# Altium PCB SENSEI_Base-Board.PcbDoc (part 4 of 10)
Units mm, origin at the board's own origin, x right, y up, seen from the top; angles counter-clockwise.
Board outline 51.6 x 28.1 mm, 8 copper layers (Top Sig/Pwr, GND1, Sig1, GND2, Sig2, Pwr, GND3, Bot Sig/Pwr), stack 1.53 mm thick; 209 components, 201 nets, 1031 pads, 2222 vias.
Unrouted connection lines stored in the file: 214.
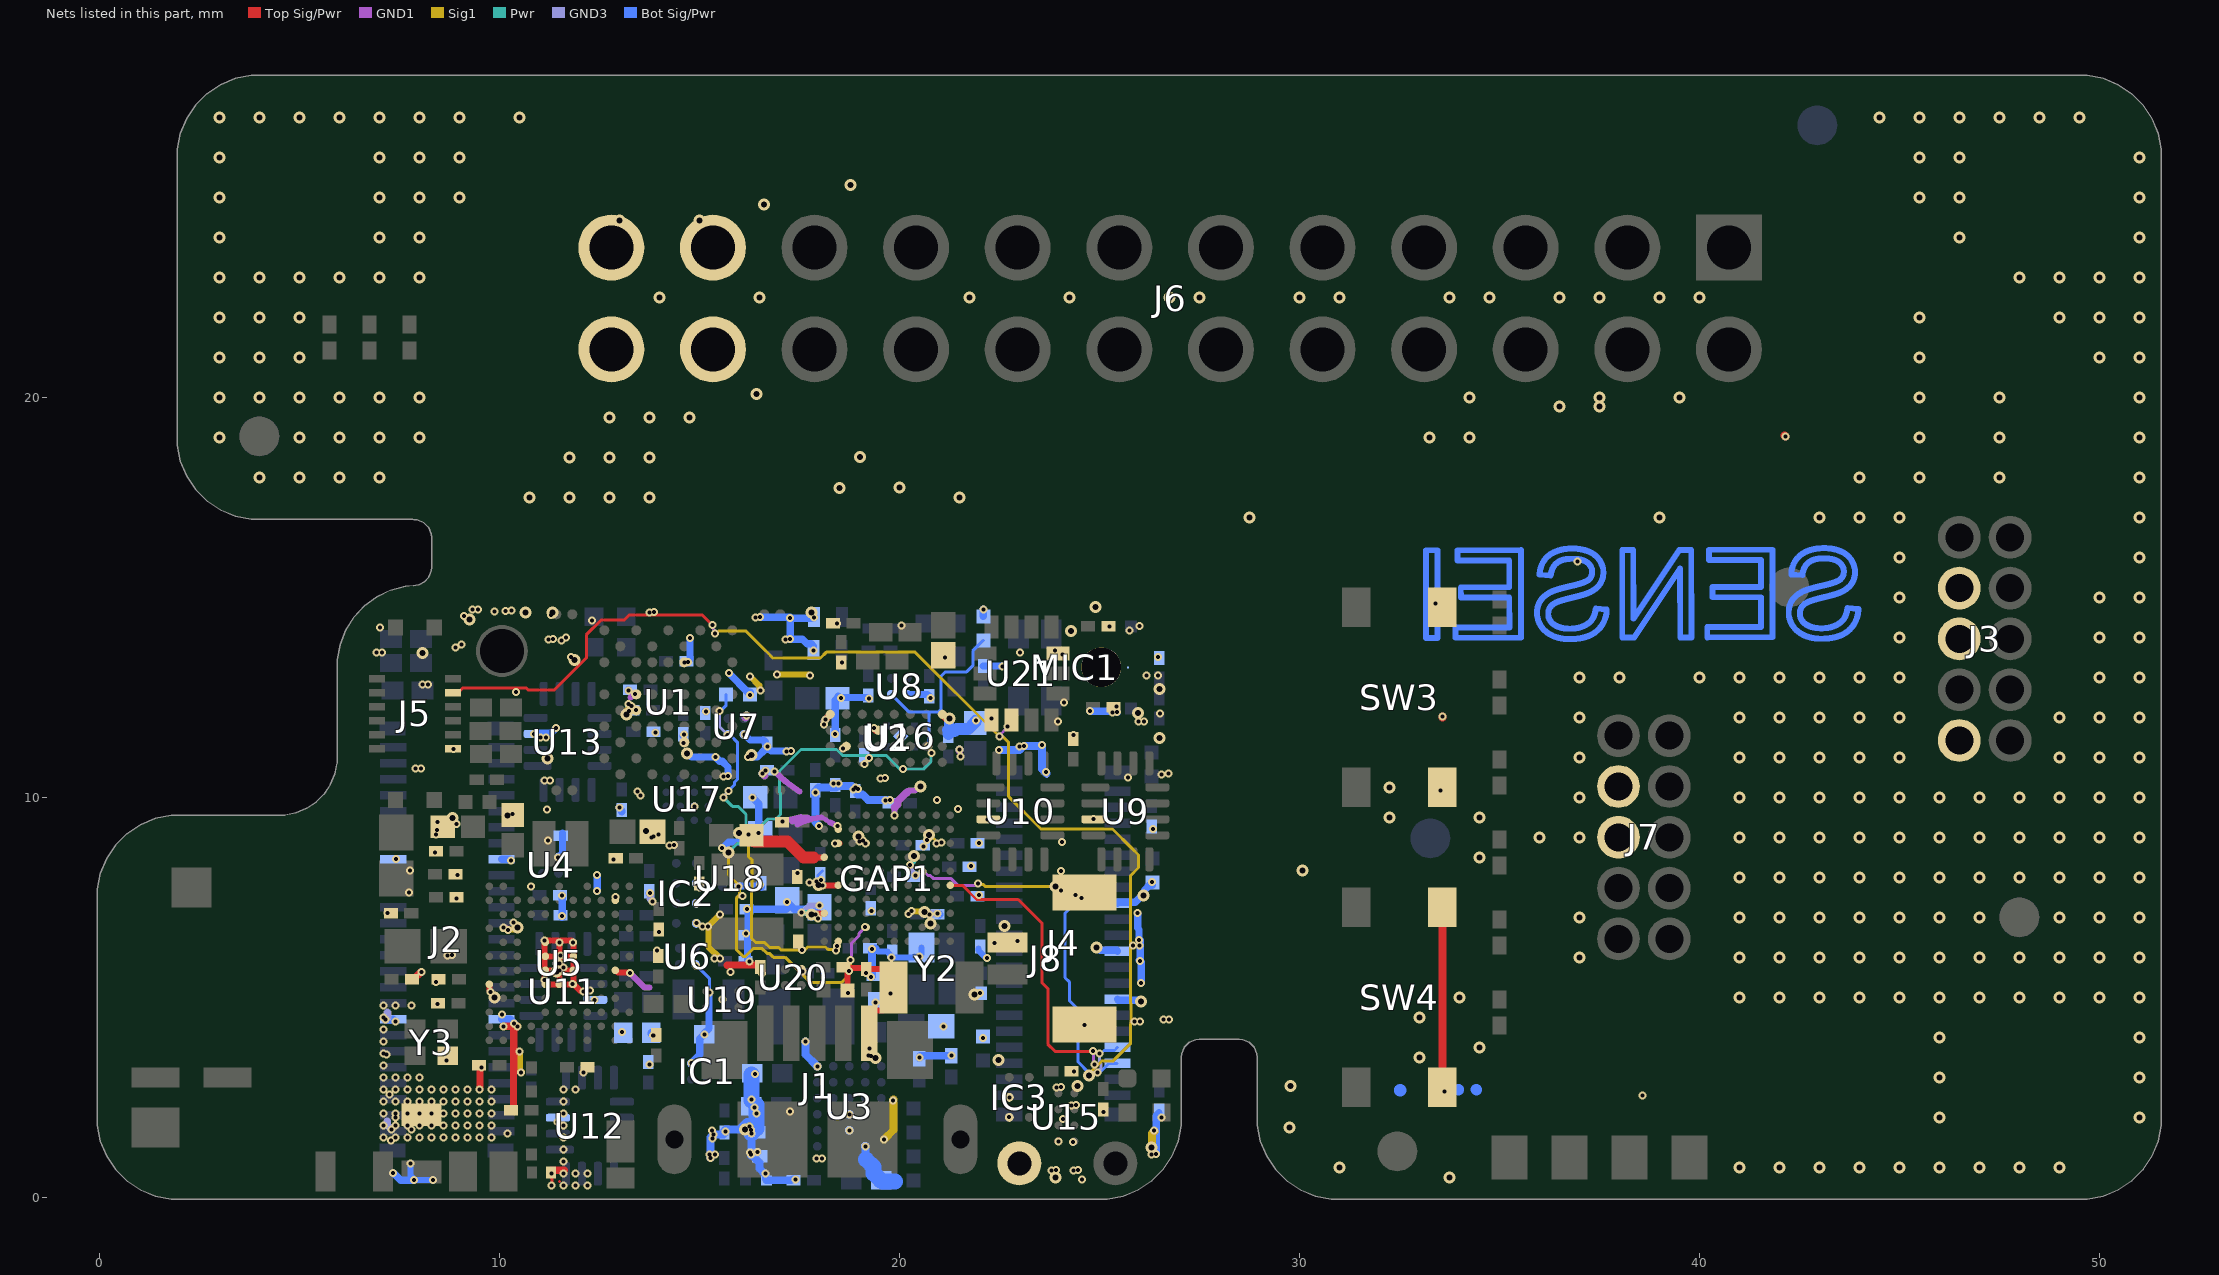
[diagram p9: the nets of this part, all layers, seen from the top]

## Via types
v1: diameter 0.2, hole 0.1, Top Sig/Pwr to GND1, 544 vias
v2: diameter 0.2, hole 0.1, GND3 to Bot Sig/Pwr, 436 vias
v3: diameter 0.2, hole 0.1, GND1 to Sig1, 385 vias
v4: diameter 0.3, hole 0.15, Sig1 to Pwr, 293 vias
v5: diameter 0.3, hole 0.15, Top Sig/Pwr to Bot Sig/Pwr, tented both sides, 284 vias
v6: diameter 0.2, hole 0.1, Pwr to GND3, 280 vias

## Nets (pads, with @x,y where several pads share a name; then routed paths per layer and width w, separated by ;. In a path a pad name is that pad's centre, name@x,y a point inside that pad or via, vN(x,y) a via of type N, cw(c..) or ccw(c..) an arc to the next point about the centre after c; other vN are vias at no path point) (continued)
GAP_GPIO50: GAP1.K5 J4.33 J5.4 U21.2 | length 37.2
  Top Sig/Pwr w0.075: J5.4@8.718,12.635 8.986,12.635 9.036,12.684 9.038,12.684 9.084,12.73 10.677,12.73 10.722,12.684 11.374,12.684 12.175,13.485 12.175,14.061 12.552,14.438 13.128,14.438 13.253,14.563 15.069,14.563 v1(15.328,14.304) ; GAP1.K5@21.275,7.8 21.577,7.8 21.933,7.445 22.972,7.445 23.572,6.845 23.572,5.36 23.712,5.219 23.712,3.828 23.891,3.65 24.84,3.65 v1(24.841,3.651)
  GND1 w0.075: v1(15.328,14.304) 15.352,14.28 15.352,14.209 15.369,14.191 15.369,14.124 v3(15.393,14.1) ; v3(22.503,11.516) 22.503,11.547 22.7,11.744 v1(22.7,11.775) ; v1(24.841,3.651) 24.861,3.631 24.861,3.342 v3(24.883,3.32)
  GND3 w0.075: v6(24.96,3.12) 24.96,3.138 25.049,3.226 25.049,3.343 25.011,3.381 v2(25.011,3.597)
  Sig1 w0.075: v3(15.393,14.1) 15.427,14.1 15.485,14.158 15.51,14.158 15.514,14.162 16.155,14.162 16.662,13.655 16.669,13.655 16.839,13.485 18.032,13.485 18.176,13.629 20.391,13.629 22.44,11.58 22.527,11.58 22.725,11.382 22.725,10.025 23.541,9.209 25.33,9.209 25.813,8.726 25.983,8.556 25.983,8.244 25.786,8.047 25.786,4.847 25.788,4.846 25.788,4.348 25.775,4.336 25.775,3.838 25.35,3.413 25.065,3.413 v3@24.927,3.276 ; v3@22.503,11.516 v3@22.548,11.56 ; v4(24.741,3.045) 24.741,3.089 v3@24.927,3.276 ; v3(24.883,3.32) v3@24.927,3.276
  Pwr w0.075: v4(24.741,3.045) 24.802,3.045 24.853,3.096 24.936,3.096 v6(24.96,3.12)
  Bot Sig/Pwr w0.075: v2(25.011,3.597) 25.042,3.597 25.117,3.672 25.378,3.672 J4.33@25.455,3.75
GAP_GPIO51: GAP1.H6 J4.35 | length 9.9
  GND1 w0.075: v1(20.584,8.146) 20.618,8.146 20.716,8.047 20.775,8.047 20.846,7.976 21.286,7.976 21.463,7.799 21.893,7.799 21.934,7.839 v3(21.967,7.839)
  GND3 w0.075: v6(24.047,7.667) 24.081,7.667 24.139,7.609 24.39,7.609 24.521,7.479 v2(24.555,7.479)
  Sig1 w0.075: v3(21.967,7.839) 21.991,7.815 22.105,7.815 22.148,7.773 v4(23.909,7.773)
  Pwr w0.075: v4(23.909,7.773) 23.926,7.773 24.031,7.667 v6(24.047,7.667)
  Bot Sig/Pwr w0.075: v2(24.555,7.479) 24.531,7.455 24.454,7.455 24.328,7.329 24.328,7.289 24.141,7.102 24.141,5.492 24.26,5.373 24.26,4.909 24.472,4.697 24.472,3.382 24.739,3.116 25.006,3.116 25.235,3.345 J4.35@25.441,3.345
GAP_MEM_pwr_sel: GAP1.B1 R11.2 U7.B2 | length 9.7
  Top Sig/Pwr w0.075: v1(18.44,6.282) 18.458,6.299 18.458,6.382 GAP1.B1@18.475,6.4
  GND1 w0.075: v3(18.42,6.176) 18.44,6.196 v1(18.44,6.282)
  GND3 w0.075: v2(15.506,12.162) 15.506,11.763 v2(15.71,11.56) ; v6(15.6,10) 15.6,10.015 15.73,10.145 v2(15.73,10.161)
  Sig1 w0.075: v4(15.992,9.101) 16.008,9.101 16.186,8.924 16.232,8.924 16.232,8.517 16.322,8.427 16.322,7.664 16.31,7.652 16.31,6.469 16.404,6.375 16.626,6.375 16.753,6.248 16.98,6.248 17.044,6.184 17.636,6.184 17.711,6.26 18.156,6.26 18.224,6.191 18.404,6.191 v3(18.42,6.176)
  Pwr w0.075: v6(15.6,10) 15.824,9.776 15.97,9.776 16.17,9.575 16.17,9.295 15.992,9.117 v4(15.992,9.101)
  Bot Sig/Pwr w0.075: v2(15.506,12.162) 15.538,12.162 15.663,12.287 R11.2@15.663,12.575 ; U7.B2@15.7,11.55 15.778,11.55 15.95,11.378 15.95,10.444 15.883,10.377 15.883,10.314 v2(15.73,10.161)
GAP_MIC_pwr_sel: GAP1.D2 R13.2 U8.B2 | length 19.6
  GND1 w0.075: v3(18.784,5.933) 18.803,5.951 18.803,6.35 18.998,6.545 18.998,6.598 19.142,6.743 v1(19.142,6.754)
  GND3 w0.075: v2(20.735,11.288) 20.759,11.264 20.759,11.181 20.804,11.135 v6(20.804,11.102)
  Sig1 w0.075: v4(15.731,8.625) 15.732,8.624 15.732,8.057 16.009,7.78 16.009,7.563 15.934,7.488 15.934,6.182 16.092,6.025 16.154,6.025 16.354,6.225 16.564,6.225 16.691,6.098 16.752,6.098 16.85,6 17.146,6 17.773,5.374 18.569,5.374 18.723,5.528 18.723,5.555 18.784,5.617 v3(18.784,5.933)
  Pwr w0.075: v4(15.731,8.625) 15.945,8.839 16.101,8.839 16.714,9.452 16.875,9.452 16.881,9.458 16.918,9.458 17.029,9.569 17.029,10.101 17.005,10.125 17.005,10.658 17.543,11.197 18.431,11.197 18.578,11.05 19.667,11.05 20.007,10.711 20.614,10.711 20.793,10.889 20.793,11.09 v6(20.804,11.102)
  Bot Sig/Pwr w0.075: U8.B2@19.8,12.575 20.24,12.135 20.736,12.135 ; v2(20.735,11.288) 20.736,11.289 20.736,12.135 ; R13.2@22.099,13.924 21.838,13.663 21.838,13.291 21.684,13.138 21.153,13.138 21.044,13.028 21.044,12.201 20.978,12.135 20.736,12.135
GND: C1.2 C2.2 C3.2 C4.2 C5.2 C6.2 C7.2 C8.2 C9.2 C10.2 C11.2 C12.2 C13.2 C14.2 C15.2 C16.2 C17.2 C18.2 C19.2 C20.2 C21.2 C22.2 C23.2 C24.2 C25.2 C26.2 C27.2 C28.2 C29.2 C30.2 C31.2 C32.2 C33.2 C34.2 C35.2 C36.2 C37.2 C38.2 C39.2 C40.2 C41.2 C42.2 C43.2 C44.2 C47.2 C48.2 C49.2 C50.2 C51.2 C52.2 C53.2 C54.2 C55.2 C56.2 C57.2 C58.2 C59.2 C60.2 C61.2 C62.2 C63.2 C64.2 C65.2 C66.2 C67.2 C68.2 C69.2 C70.2 C71.2 C72.2 C73.2 C74.2 C75.2 C76.2 C77.2 C78.2 C79.2 C80.2 C81.2 C82.2 C83.2 C84.2 C85.2 C86.2 C87.2 C88.2 C89.2 C90.2 C91.2 C92.2 C94.2 C95.2 C96.2 C97.2 C98.2 C99.2 D2.2 D3.2 GAP1.A3 GAP1.A7 GAP1.B5 GAP1.B8 GAP1.B9 GAP1.D8 GAP1.F10 GAP1.G3 GAP1.J8 IC1.A3 IC2.B1 IC2.C1 IC2.D1 IC3.B1 IC3.C1 J1.5 J2.8 J2.18 J2.33 J2.43 J3.3 J3.5 J3.9 J4.15 J4.21 J4.27 J5.12 J6.21 J6.22 J6.23 J6.24 J7.3 J7.5 J8.2 J8.3 J8.4 L9.1 MIC1.3 R2.1 R11.1 R12.1 R13.1 R16.2 R17.1 R23.1 R32.1 RT1.2 S1.1 SW3.3 SW3.4 SW4.3 SW4.4 U1.F6 U1.F7 U1.J4 U1.J9 U2.B7 U2.C5 U2.D1 U2.D8 U3.B1 U3.C2 U3.C3 U3.E6 U4.B1 U5.A5 U5.B2 U5.B9 U5.C2 U5.D12 U5.E5 U5.E6 U5.E7 U5.E8 U5.F5 U5.F6 U5.F7 U5.F8 U5.G5 U5.G6 U5.G7 U5.G8 U5.K6 U5.K11 U6.B1 U7.B1 U8.B1 U9.3 U10.3 U11.3 U12.3 U13.3 U15.D1 U16.3 U17.C2 U18.B1 U19.B1 U20.B1 U21.1 U21.7 Y2.2 Y3.2 | length 161.8
  Top Sig/Pwr w0.075: v1(10.333,9.577) 10.335,9.579 C72.2@10.335,9.605 ; C68.2@11.288,0.512 11.313,0.487 11.313,0.262 v1@11.325,0.25 ; C68.2@11.288,0.625 11.3,0.613 C68.2@11.3,0.5 ; 11.5,0.4 11.504,0.4 ; v1(13.937,6.17) 13.937,6.117 C77.2@13.975,6.079 ; C75.2@13.985,6.646 13.985,6.636 v1(13.988,6.634)
  Top Sig/Pwr w0.15: U5.A5@9.75,5.325 9.758,5.317 9.758,5.164 9.78,5.141 v1(9.78,5.127) ; U5.B9@10.1,6.725 10.1,6.738 v1(10.111,6.749) ; v1(10.798,7.77) 10.8,7.772 U5.D12@10.8,7.775 ; U5.E6@11.125,5.65 U5.E6@11.136,5.661 ; U5.E8@11.125,6.375 11.136,6.364 U5.E6@11.136,5.661 ; U5.E7@11.15,6.025 U5.F7@11.5,6.025 ; U5.E8@11.15,6.375 11.128,6.397 v1(11.128,6.424) 11.801,6.424 U5.G8@11.85,6.375 v1(11.845,6.37) 11.85,6.365 U5.G7@11.85,6.025 U5.G7@11.85,6 ; U5.F8@11.5,6.375 11.501,6.374 v1(11.501,6.369) 11.5,6.368 11.5,6.05 v1(11.525,6.05) ; U5.G5@11.825,5.35 11.85,5.375 U5.G6@11.85,5.675 ; v1(12.1,5.15) 12.09,5.16 12.026,5.16 11.861,5.325 U5.G5@11.85,5.325 U5.F5@11.5,5.325 ; U5.K6@12.9,5.675 12.911,5.675 12.972,5.614 13.261,5.614 v1(13.27,5.605) ; U5.K11@12.9,7.425 12.903,7.428 12.903,7.503 v1(12.905,7.505) ; v1(13.39,12.585) U1.F7@13.425,12.575 ; 17.85,8.5 GAP1.A7@18.122,8.5 ; v1@17.881,7.056 17.922,7.056 17.959,7.093 18.118,7.093 GAP1.A3@18.125,7.1 ; v1(18.075,7.8) GAP1.B5@18.475,7.8 ; GAP1.A7@18.12,8.498 GAP1.A7@18.122,8.5 ; GAP1.A7@18.125,8.5 GAP1.A7@18.122,8.5 ; v1(18.454,9.28) 18.454,9.266 18.468,9.252 18.468,9.207 GAP1.B9@18.475,9.2 ; GAP1.B8@18.5,8.85 GAP1.B8@18.475,8.85 ; C96.2@18.659,5.75 C96.2@18.7,5.709 ; C96.2@18.725,5.775 18.7,5.75 C96.2@18.7,5.709 ; v1(19.161,8.85) GAP1.D8@19.175,8.85 ; v1(19.165,5.606) 19.175,5.616 R16.2@19.175,5.704 R16.2@19.221,5.704 ; R16.2@19.225,5.7 R16.2@19.221,5.704 ; v1(19.25,3.725) J1.5@19.25,4.1 19.25,4.547 19.378,4.675 19.575,4.675 C91.2@19.725,4.825 ; v1(19.775,5.1) 19.85,5.175 C91.2@19.85,5.25 ; C91.2@19.85,5.675 19.821,5.704 R16.2@19.221,5.704 ; GAP1.G3@20.225,7.1 20.228,7.097 v1(20.228,7.081) ; v1(22.2,9.45) U10.3@22.225,9.45 ; U5.E6@11.136,5.661 v1(11.136,5.426) 11.15,5.426 11.251,5.325 U5.F5@11.5,5.325 ; U5.E6@11.136,5.661 U5.E6@11.15,5.675 v1(11.5,5.675) ; U5.F5@11.5,5.325 v1(11.5,5.675) ; v1(11.5,5.675) U5.G6@11.85,5.675 ; v1(11.5,5.675) U5.F7@11.5,6.025 ; U5.F7@11.5,6.025 11.825,6.025 U5.G7@11.85,6 ; U5.G6@11.85,5.675 U5.G7@11.85,6 ; GAP1.B8@18.475,8.85 v1(18.394,8.85) GAP1.B8@18.475,8.85 ; R32.1@18.7,5.175 C96.2@18.7,5.709 ; R32.1@18.7,5.175 18.7,5.129 v1(18.72,5.109) 18.72,5.155 R32.1@18.7,5.175 ; C96.2@18.7,5.709 18.74,5.669 v1(18.74,5.661) 18.806,5.727 19.198,5.727 R16.2@19.221,5.704
  Top Sig/Pwr w0.18: C65.2@7.864,5.45 7.864,5.454 8.034,5.624 8.046,5.624 v1(8.05,5.628) ; C69.2@8.371,8.65 8.371,8.639 v1(8.387,8.622) ; v1(8.423,5.386) 8.431,5.394 C73.2@8.431,5.45 ; v1(8.442,9.18) 8.528,9.267 C71.2@8.539,9.267 ; v1(8.675,3.425) 8.71,3.46 Y3.2@8.71,3.54 ; v1(8.93,7.469) 8.961,7.5 C70.2@8.979,7.5 ; v1(8.951,8.061) 8.954,8.064 C74.2@8.954,8.075 ; C66.2@9.496,3.3 9.5,3.3 v1(9.55,3.25) ; v1@9.515,2.7 9.515,3.259 C66.2@9.539,3.259 ; U5.B2@10.1,4.275 v1(10.102,4.275) ; v1(10.102,4.275) v1(10.45,4.275) 10.45,4.272 10.36,4.182 10.36,3.15 10.354,3.144 C67.2@10.354,2.175 ; C68.2@11.262,0.625 11.262,0.64 11.298,0.675 v1@11.625,0.675 ; v1(12.1,3.125) 12.1,3.13 12.117,3.148 12.117,3.209 12.159,3.25 C80.2@12.22,3.25 ; v1(12.853,8.445) 12.853,8.467 C79.2@12.861,8.474 ; v1(13.415,12.179) 13.42,12.175 U1.F6@13.425,12.175 ; v1(13.859,4.05) 13.875,4.066 C76.2@13.875,4.104 ; v1(14.611,11.358) 14.611,11.361 U1.J4@14.625,11.375 ; U19.B1@15.575,4.95 v1(15.579,4.948) v1(15.579,4.948) ; 15.7,5.8 15.704,5.804 16.525,5.804 16.568,5.667 v1(16.568,5.598) ; v1(16.231,9.065) 16.246,9.05 C49.2@16.352,9.05 ; U20.B1@17.55,5.7 17.581,5.669 v1(17.581,5.642) ; v1(18.153,11.942) 18.153,11.948 18.275,12.07 U2.D8@18.275,12.075 ; v1(18.441,14.347) 18.443,14.347 C62.2@18.446,14.35 ; v1(18.597,11.217) 18.601,11.22 18.607,11.22 18.661,11.275 U2.B7@18.675,11.275 ; v1(19.363,11.734) 19.422,11.675 U2.C5@19.475,11.675 ; C59.2@21.1,13.55 v1(21.146,13.497) ; U21.1@22.3,11.937 v1(22.3,11.975) ; v1(22.742,2.005) 22.745,2.005 IC3.C1@22.75,2 ; IC3.B1@22.75,2.5 IC3.B1@22.75,2.5 v1(22.755,2.497) ; U21.7@23.962,13.6 23.987,13.575 v1(24.075,13.575) ; U15.D1@23.975,1.395 U15.D1@23.975,1.4 U15.D1@23.975,1.4 v1(23.982,1.401) ; C94.2@24.359,3.15 C94.2@24.368,3.141 ; C61.2@25.1,2.146 25.1,2.137 v1(25.111,2.126)
  Top Sig/Pwr w0.185: C60.2@25.229,14.275 v1(25.25,14.275) ; C58.2@25.354,12.25 25.379,12.275 v1(25.425,12.275)
  Top Sig/Pwr w0.2: C83.2@13.882,9.139 13.946,9.075 v1(13.975,9.075) ; U2.D1@21.075,12.075 21.083,12.075 21.175,11.983 21.242,11.983 v5(21.261,11.964) ; v1(33.4,14.85) SW3.4@33.575,14.75 ; v1(33.525,10.175) SW3.3@33.575,10.25 ; SW4.4@33.575,7.25 SW4.3@33.575,2.75 v1(33.625,2.65) ; v1@33.575,12 v1(33.575,12.025) ; v1@42.125,19.05 v1(42.15,19.025)
  Top Sig/Pwr w0.3: C49.2@16.35,8.925 16.375,8.9 17.2,8.9 17.6,8.5 17.85,8.5
  GND1 w0.075: v3(7.4,2) v1(7.4,2.1) ; v1(20.925,8.85) 20.937,8.862 21.038,8.862 v3(21.05,8.875)
  GND1 w0.12: 18.05,9.5 18.137,9.457 cw(c18.031,9.247) 18.172,9.435 ccw(c18.359,9.682) 18.185,9.425 18.266,9.371
  GND1 w0.15: v1(10.111,6.749) 10.12,6.739 10.149,6.739 10.209,6.679 v3(10.222,6.679) ; v1(11.5,5.675) v3(11.5,5.85) ; v1(13.27,5.605) 13.625,5.25 13.75,5.25 ; 13.28,12.495 v1(13.39,12.585) ; v3(16.875,10.65) 17.149,10.402 ccw(c17.35,10.625) 17.176,10.381 17.5,10.15 ; v1(17.075,9.4) 17.545,9.506 ccw(c17.629,9.82) 17.632,9.495 17.7,9.496 ; 17.325,9.4 17.595,9.449 cw(c17.622,9.301) 17.605,9.451 18.05,9.5 ; 17.45,9.325 17.622,9.403 cw(c17.725,9.175) 17.668,9.418 17.795,9.448 ; v3(17.761,7.864) 17.77,7.855 17.859,7.855 17.904,7.81 18.065,7.81 v1(18.075,7.8) v1@18.078,7.803 ; v1(17.9,7.075) v1@17.9,7.061 ; v3@17.954,6.99 17.954,7.008 v1@17.9,7.061 ; v3(17.963,6.966) 17.963,6.98 17.95,6.993 17.95,7.011 v1@17.9,7.061 ; 18.266,9.371 v1(18.454,9.28) ; v3(19.086,8.916) 19.09,8.916 19.157,8.85 v1(19.161,8.85) ; v1(19.25,3.725) 19.26,3.715 19.26,3.577 19.294,3.543 v3(19.294,3.529) ; v1(19.876,9.55) 19.885,9.56 19.885,9.748 ; 20.187,10.125 20.236,10.174 20.329,10.174 20.393,10.175 20.489,10.271 v5(20.53,10.271) ; v1(20.228,7.081) 20.231,7.081 20.301,7.151 v3(20.301,7.153)
  GND1 w0.18: v1(8.442,9.18) 8.442,9.378 v3(8.45,9.386) ; v3(13.305,12.284) 13.308,12.284 13.412,12.179 v1(13.415,12.179) ; v3(18.119,11.814) 18.122,11.818 18.122,11.906 18.153,11.937 v1(18.153,11.942)
  GND1 w0.2: v3(13.85,9.025) 13.925,9.025 v1(13.975,9.075) ; v1@16.15,12 v1(16.175,12.05) ; v1(16.575,10.6) v1@16.625,10.55 ; 19.885,9.748 19.951,9.814 19.951,9.889 20.187,10.125 ; v1@21.5,11.175 v1(21.5,11.2)
  GND3 w0.075: v2(20.599,8.776) 20.599,8.805 20.693,8.898 v6(20.693,8.927) ; v2(23.673,10.629) 23.694,10.608 23.694,10.514
  GND3 w0.15: v2(11.425,5.85) 11.435,5.84 11.496,5.84 11.586,5.75 v6(11.6,5.75) ; v6(17.559,7.12) 17.572,7.12 17.742,7.29 17.99,7.29 v2(18,7.3) ; v2(17.925,7.9) 17.939,7.9 17.967,7.928 18.028,7.928 v6(18.037,7.938) ; v2@19.31,6.204 v2(19.323,6.204) ; v6(20.268,8.302) 20.278,8.292 20.278,8.186 20.405,8.059 v2(20.405,8.045)
  GND3 w0.18: 7.2,1.9 7.2,1.805 7.3,1.705 v6(7.3,1.7) ; v6(13.232,12.329) 13.232,12.173 v2(13.247,12.158) ; v2(13.772,7.611) 13.775,7.607 13.775,7.455 13.825,7.405 v6(13.825,7.4)
  GND3 w0.2: v2(7.156,4.445) 7.2,4.489 7.2,4.625 ; v6(16.254,1.77) 16.254,1.646 v2(16.3,1.6) ; v6(16.262,1.115) 16.439,1.115 v2(16.454,1.13) ; v6(20.75,7.075) 20.8,7.075 20.825,7.1 v2(20.95,7.1)
  Sig1 w0.075: 16.23,1.166 16.23,1.135 v3(16.292,1.073) ; v4(20.744,9.053) 20.778,9.053 20.947,8.885 21.04,8.885 v3(21.05,8.875)
  Sig1 w0.15: v3(10.222,6.679) 10.232,6.689 10.358,6.689 10.409,6.739 v4(10.449,6.739) ; v4(11.425,5.65) 11.425,5.691 11.49,5.756 11.49,5.84 v3(11.5,5.85) ; v3@15.225,6.75 15.225,6.268 v3(15.52,5.973) ; v3@15.25,6.8 15.25,6.803 v3(15.52,7.073) ; v3(16.272,13.024) 16.272,13.021 16.5,12.793 v3@16.5,12.7 ; v3(16.945,13.073) 16.967,13.073 16.968,13.075 17.722,13.075 17.753,13.044 v3(17.767,13.044) ; v3(17.761,7.864) 17.77,7.855 17.896,7.855 17.94,7.811 v4(17.981,7.811) ; v4(17.8,7.075) 17.841,7.075 17.906,7.01 17.95,6.966 v3(17.963,6.966) ; v4(18.974,9.015) 18.981,9.015 19.08,8.916 v3(19.086,8.916) ; v3(19.294,3.529) 19.303,3.519 19.321,3.519 19.362,3.478 v4(19.403,3.478) ; v3(20.301,7.153) 20.311,7.143 20.613,7.143 v4(20.628,7.128) ; v3(21.525,11.025) v3@21.525,11.05
  Sig1 w0.18: v3(8.45,9.386) 8.454,9.39 8.701,9.39 8.794,9.484 v4(8.827,9.484) ; v3(10.502,3.64) 10.502,3.172 v3@10.549,3.125 ; v4(13.181,12.066) 13.204,12.089 13.204,12.178 13.305,12.278 v3(13.305,12.284)
  Sig1 w0.2: v4(13.664,9.153) 13.691,9.153 13.819,9.025 v3(13.85,9.025) ; v4(16.141,1.689) 16.15,1.679 v3(16.287,1.679) ; v3(19.62,1.448) 19.85,1.678 v3@19.85,2.45 ; v4(26.3,1.25) 26.319,1.269 26.319,1.594 v3@26.375,1.65
  Pwr w0.075: v4(20.628,7.128) 20.681,7.075 v6(20.75,7.075) ; v6(20.693,8.927) 20.693,9.002 v4(20.744,9.053)
  Pwr w0.15: v6(10.354,6.873) 10.354,6.86 10.449,6.765 v4(10.449,6.739) ; v4(11.425,5.65) 11.466,5.65 11.556,5.74 11.59,5.74 v6(11.6,5.75) ; v6(17.559,7.12) 17.568,7.111 17.724,7.111 17.759,7.075 v4(17.8,7.075) ; v4(17.981,7.811) 17.981,7.851 18.028,7.898 18.028,7.928 v6(18.037,7.938) ; v4(18.974,9.015) 19,8.99 19,8.901 v6(19.009,8.891) ; v6(19.225,3.55) 19.235,3.54 19.3,3.54 19.362,3.478 v4(19.403,3.478) ; v6(20.268,8.302) 20.268,8.315 20.34,8.387 20.34,8.503 v4(20.369,8.532)
  Pwr w0.18: v4(8.827,9.484) 8.827,9.451 8.923,9.355 8.923,9.332 v6(8.926,9.328) ; v4(13.181,12.066) 13.204,12.089 13.204,12.129 13.228,12.153 13.228,12.325 v6(13.232,12.329)
  Pwr w0.2: v4(13.664,9.153) 13.664,9.136 v6(13.8,9) ; v4(16.141,1.689) 16.168,1.689 16.248,1.77 v6(16.254,1.77)
  Bot Sig/Pwr w0.075: U6.B1@14.9,5.825 14.917,5.808 v2(14.917,5.777) 14.948,5.777 15.25,5.475 v2(15.25,5.125) ; C43.2@16.33,3.15 v2(16.393,3.087) ; C9.2@17.874,10.099 v2(17.9,10.125) ; v2(17.925,7.9) C86.2@17.931,7.9 ; C86.2@17.981,7.9 17.981,7.954 17.967,7.967 17.967,8.053 C86.2@18.075,8.16